# Altium PCB 海关全向控制器USB转接板V4.PcbDoc
Units mm, origin at the board's own origin, x right, y up, seen from the top; angles counter-clockwise.
Board outline 42 x 12 mm, 2 copper layers (Top Layer, Bottom Layer), stack 1.071 mm thick; 2 components, 6 nets, 19 pads, 0 vias.
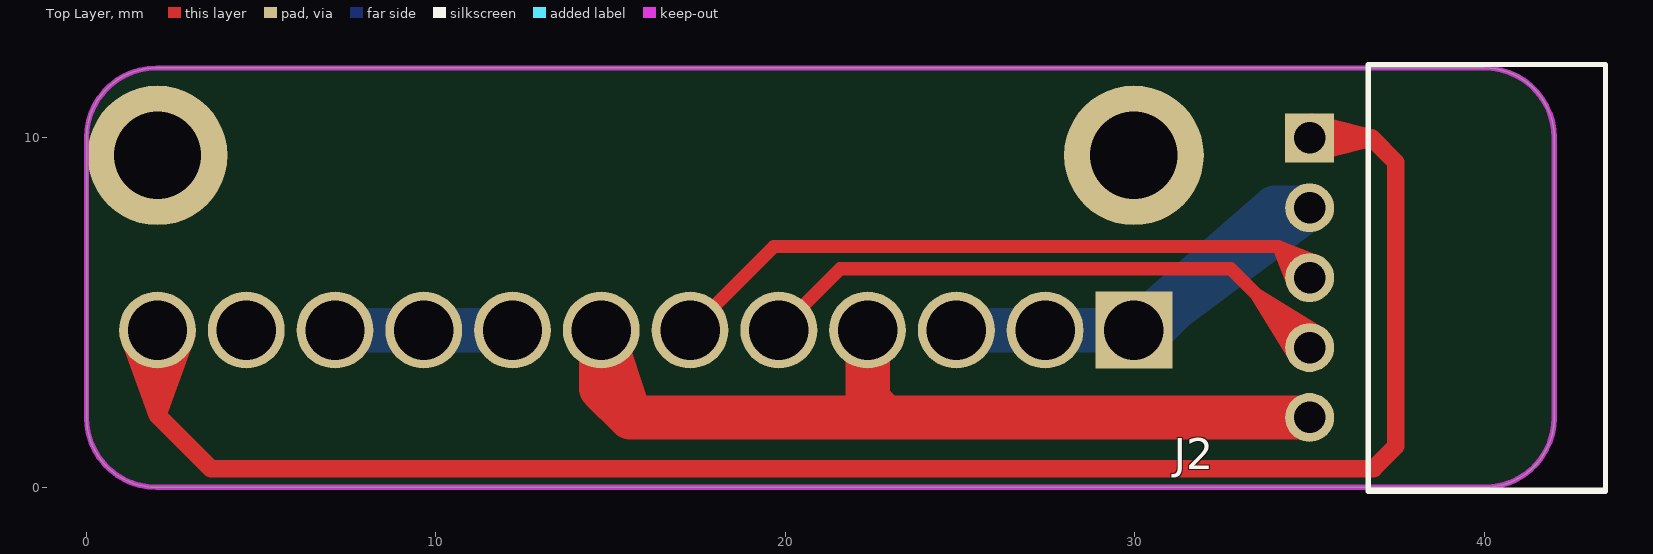
[diagram p0: Top Layer view]
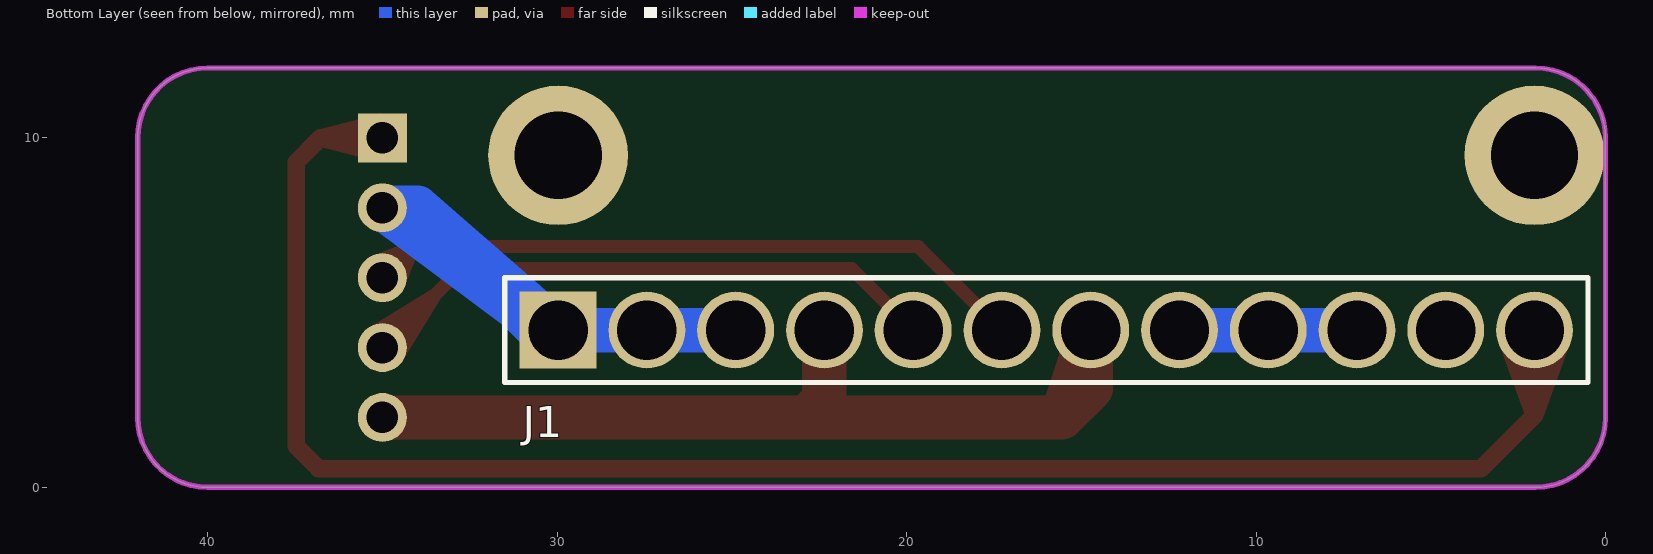
[diagram p1: Bottom Layer view, seen from below]

## Layer stack, top to bottom
Top Solder: solder mask 0.0102, Solder Resist, Dk 3.5
Top Layer: signal copper 0.0356
Dielectric 1: dielectric 1, FR-4, Dk 4.8
Bottom Layer: signal copper 0.0356
Bottom Solder: solder mask 0.0102, Solder Resist, Dk 3.5

## Board outline
0,2 0,10 cw(c2,10) 2,12 40,12 cw(c40,10) 42,10 42,2 cw(c40,2) 40,0 2,0 cw(c2,2)

## Design rules (kind name [scope] priority, off if disabled: settings)
Clearance [All] p1: gap=0.203
DiffPairsRouting [All] p1: maxlimit=0.254 minlimit=0.254 mostfreqgap=0.254 toplayer_minwidth=0.381 toplayer_maxwidth=0.381 toplayer_prefwidth=0.381 bottomlayer_minwidth=0.381 bottomlayer_maxwidth=0.381 bottomlayer_prefwidth=0.381 maxuncoupledlength=12.7
PolygonConnect [All] p1: connectstyle=Relief reliefconductorwidth=0.254 reliefentries=4 polygonreliefangle="90 Angle" airgapwidth=0.254
RoutingVias [All] p1: holewidth=0.711 width=1.27 viastyle="Through Hole" minholewidth=0.711 minwidth=1.27 maxholewidth=0.711 maxwidth=1.27
SolderMaskExpansion [All] p1: expansion=0.102
Width [All] p1: maxlimit=1.27 minlimit=0.254 preferedwidth=0.254
28 further rules are at their usual default settings.

## Classes and differential pairs
differential pair DATA: +DATA_P -DATA_N

## Components (designator, comment, footprint, x,y, rotation, side; value= is the part's Value field where it differs from the comment)
J1 "Jack1x12" PPM.12-711-0102 16,4.5 r180 bottom locked
J2 "Jack 1x5" 35363-0560 35,6 r90 top

## Footprints (in the part's own frame and the unit in brackets; to place one, negate y for a bottom-side part, rotate by r counter-clockwise, add the part's x,y. Pads: shape width x height; smd on the part's side, far side on the other; paste and mask are expansions set on the pad)
35363-0560 [mm]
  rect 1.4x1.4 hole 0.9: 1(4,0)
  round 1.4 hole 0.9: 2(2,0) 3(0,0) 4(-2,0) 5(-4,0)
  silkscreen extent -6.11,-8.46 6.1,-1.67, body extent -6.15,-8.52 6.15,1.98, height 5.75
PPM.12-711-0102 [mm]
  rect 2.2x2.2 hole 1.7: 1(-13.97,0)
  round 2.2 hole 1.7: 2(-11.43,0) 3(-8.89,0) 4(-6.35,0) 5(-3.81,0) 6(-1.27,0) 7(1.27,0) 8(3.81,0) 9(6.35,0) 10(8.89,0) 11(11.43,0) 12(13.97,0)
  silkscreen extent -15.5,-1.5 15.5,1.5, body extent -15.24,-1.24 15.24,1.3, height 4.93

## Part data
J1 J2: "插座"

## Free pads (board coordinates)
  round 4 hole 2.5: ""(2.03,9.5) ""(29.97,9.5)

## Nets (pads, with @x,y where several pads share a name; then routed paths per layer and width w, separated by ;. In a path a pad name is that pad's centre, name@x,y a point inside that pad or via, vN(x,y) a via of type N, cw(c..) or ccw(c..) an arc to the next point about the centre after c; other vN are vias at no path point)
5V_CH+: J1.8 J1.9 J1.10 | length 5.1
  Bottom Layer w1.27: J1.10 J1.9 J1.8
+5VA: J1.1 J1.2 J1.3 J2.2 | length 28.7
  Bottom Layer w1.27: J1.3 J1.2 J1.1 ; J1.1@30.914,5.319 J2.2 ; J1.1@31.056,5.053 J2.2 ; J1.1 30.503,4.5 34.003,8 ; J1.1 33.982,7.979 J2.2 ; 34.003,8 J2.2 ; 34.003,8 J2.2
DATA_N: J1.6 J2.3 | length 22.9
  Top Layer w0.381: J1.6 19.66,6.89 34.11,6.89 ; J2.3@34.574,5.72 34.11,6.89 ; J2.3@35.28,6.426 34.11,6.89 ; 34.11,6.89 J2.3 34.11,6.89
DATA_P: J1.5 J2.4 | length 23.2
  Top Layer w0.381: J1.5 21.565,6.255 32.745,6.255 J2.4 33.492,5.508 ; J2.4@34.599,3.685 33.492,5.508 ; J2.4@35.315,4.401 33.492,5.508
GND: J1.4 J1.7 J2.5 | length 31.3
  Top Layer w1.27: J2.5 22.86,2 ; 14.73,2.828 15.558,2 ; 14.73,2.828 J1.7 ; 14.73,2.828 J1.7 ; J1.7 15.558,2 ; 15.558,2 22.86,2 ; 22.35,2.51 J1.4 22.35,2.51 ; 22.35,2.51 22.86,2
PADDET: J1.12 J2.1 | length 65.4
  Top Layer w0.508: J1.12@1.197,4.353 2.03,2.066 ; J1.12@1.693,4.477 2.03,2.066 ; J1.12@2.367,4.477 2.03,2.066 ; J1.12@2.863,4.353 2.03,2.066 ; J2.1 36.768,10 ; J2.1@35.056,9.558 36.768,10 ; J2.1@35.056,10.442 36.768,10 ; 2.03,2.066 3.563,0.533 36.823,0.533 37.465,1.175 37.465,9.303 36.768,10 ; 2.03,2.066 J1.12 2.03,2.066
pads on no net: J1.11

## Keep-outs
Keep-Out Layer:
  the board outline again, w0.152